# EAGLE board Copy of PCP C242  - Project Lemon (EAGLE 9.7.0)

Size 170.44 x 37.14 mm. Coordinates in mm from the lower left corner, seen from the top.
Outline: 0,0 170.44,0 170.44,37.13 0,37.13 0,0
Copper layers (1*16): Top 0.035mm / dielectric 1.5mm / Bottom 0.035mm
Design rules "default": minimum track width 6mil, minimum drill 0.35mm, track to track 6mil, track to pad 6mil, pad to pad 6mil, via to via 6mil, smd to smd 6mil, copper to edge 40mil, drill to drill 6mil, minimum pad ring 10mil, minimum via ring 8mil, stop-mask expansion 4mil, vias tented up to drill 0mil, thermal gap 10mil

## Footprints (pad centres in the part's own frame; a part is rotated, then mirrored left to right if it is on the bottom)
BATTERY-GENERIC = drill 1.118 pad 3.15 octagon: + 2.54,0; - -2.54,0
LEDRD254W60D565H860B_G = drill 0.981 pad 1.581: 1 -1.27,0; 2 1.27,0

## Placement (x,y rotation side)
BAT1  LEMON  [BATTERY-GENERIC]  8.26,12.02 0 top
BAT2  LEMON  [BATTERY-GENERIC]  84.96,8.6 0 top
BAT3  LEMON  [BATTERY-GENERIC]  162.18,8.26 0 top
D1  GREEN  [LEDRD254W60D565H860B_G]  18.01,29.23 180 top

## Library data of the parts
BAT1-BAT3 = Tinkercad
D1 = Tinkercad; CATEGORY: Opto-Electronic; SUB-CATEGORY: LED; VALUE: LED_GREEN

## Nets
BAT1+: BAT1.+ BAT2.-
BAT1-: BAT1.- D1.2
BAT2+: BAT2.+ BAT3.-
BAT3+: BAT3.+ D1.1

## Tracks (layer width: path | path; a pad name or v marks a point on that pad's centre or on a via)
BAT1+  (1 unrouted)
BAT1-  (1 unrouted)
BAT2+  (1 unrouted)
BAT3+  (1 unrouted)